# Altium PCB PCB_时钟_2022-10-18.pcbdoc
Units mil, origin at the board's own origin, x right, y up, seen from the top; angles counter-clockwise.
Board outline 4947 x 4947 mil, 2 copper layers (Top Layer, Bottom Layer); 34 components, 141 nets, 355 pads, 47 vias.
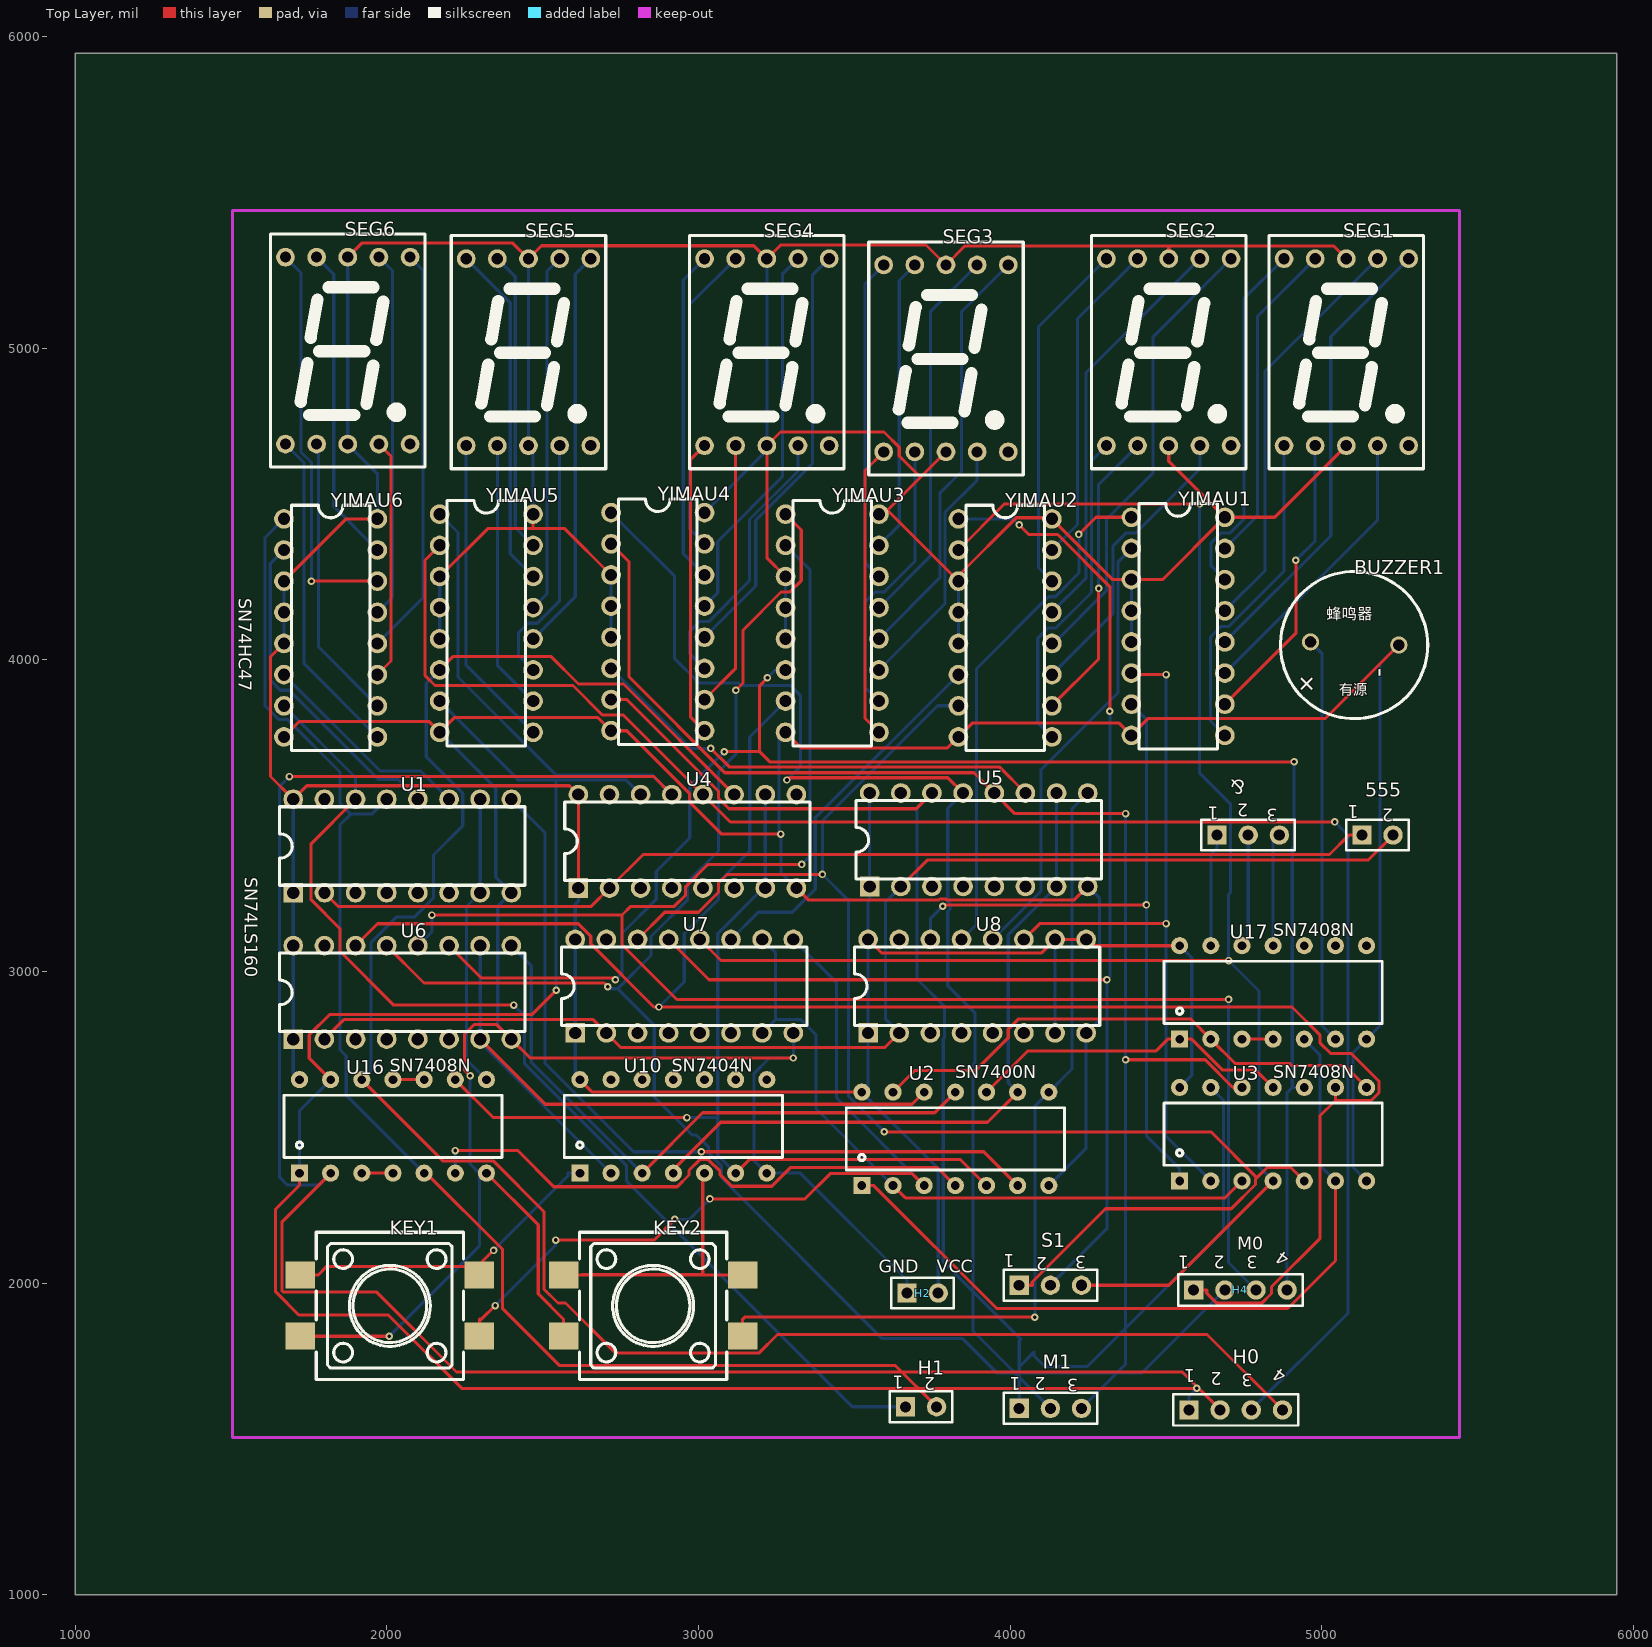
[diagram p0: Top Layer view]
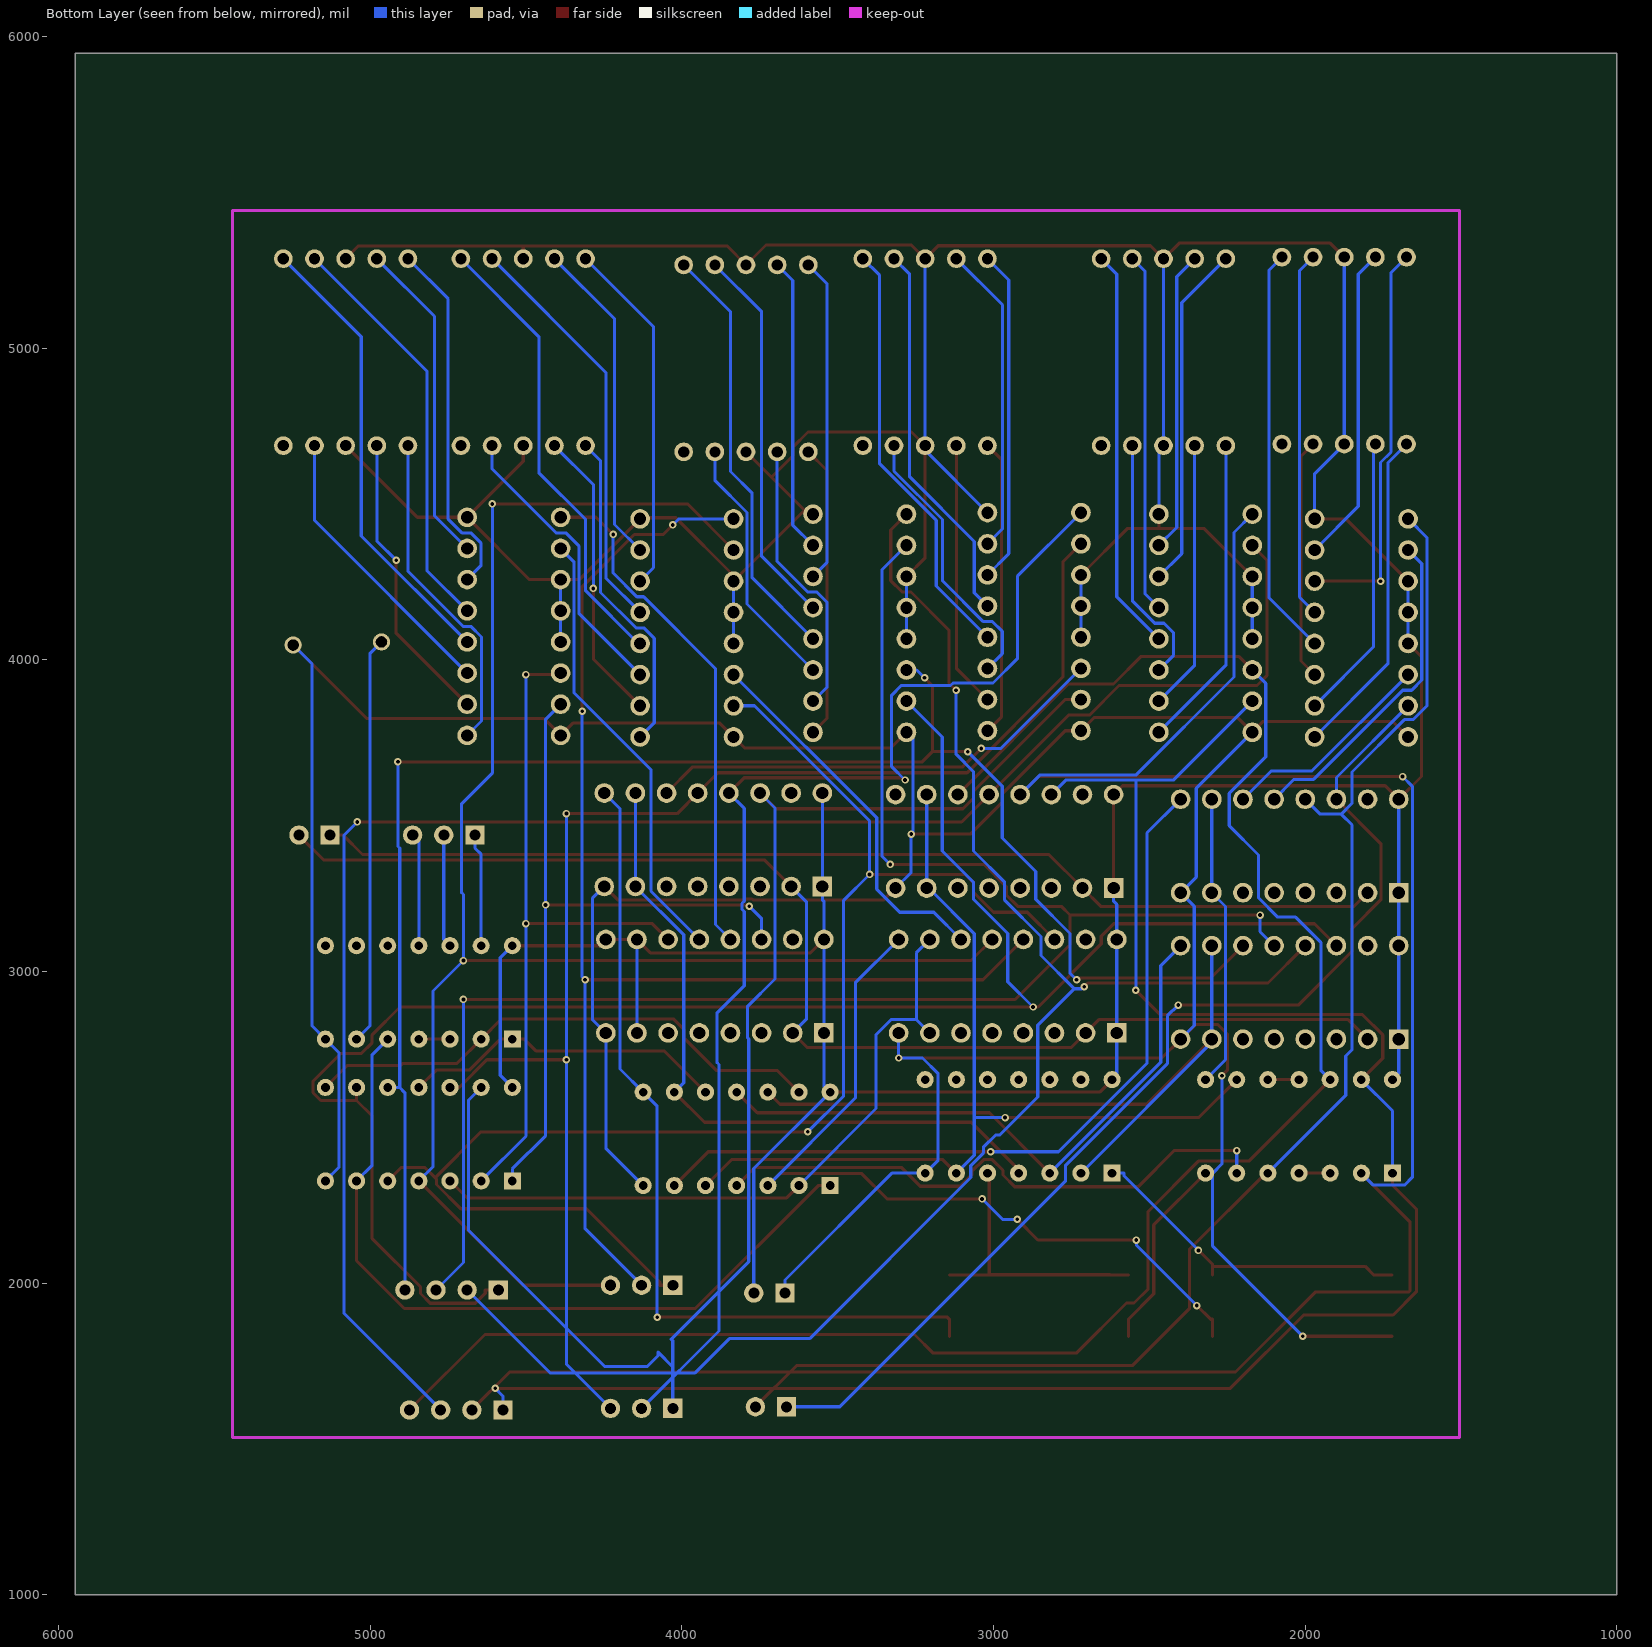
[diagram p1: Bottom Layer view, seen from below]

## Layer stack, top to bottom
Top Layer: signal copper (thickness not stored)
Dielectric: dielectric 12.6, FR-4, Dk 4.8
Bottom Layer: signal copper (thickness not stored)

## Board outline
5947,1000 1000,1000 1000,5947 5947,5947

## Components (designator, comment, footprint, x,y, rotation, side; value= is the part's Value field where it differs from the comment)
555 "HDR-F-2.54_1x2" HDR-F-2.54_1X2 5179.41,3437.91 r0 top
& "HDR-F-2.54_1x3" HDR-F-2.54_1X3 4764.41,3437.91 r0 top
BUZZER1 "有源蜂鸣器3v" 有源蜂鸣器3V 5104.41,4047.91 r0 top
H0 "HDR-F-2.54_1x4" HDR-F-2.54_1X4 4724.41,1592.91 r0 top
H1 "HDR-F-2.54_1x2" HDR-F-2.54_1X2 3714.41,1602.91 r0 top
H2 "HDR-F-2.54_1x2" HDR-F-2.54_1X2 3719.41,1967.91 r0 top
H4 "HDR-F-2.54_1x4" HDR-F-2.54_1X4 4739.41,1977.91 r0 top
KEY1 "K4-12×12_SMD" KEY-SMD_4P-L12.0-W12.0-P5.00-LS15.2 2009.41,1927.91 r0 top
KEY2 "K4-12×12_SMD" KEY-SMD_4P-L12.0-W12.0-P5.00-LS15.2 2854.41,1927.91 r0 top
M1 "HDR-F-2.54_1x3" HDR-F-2.54_1X3 4129.41,1597.91 r0 top
S1 "HDR-F-2.54_1x3" HDR-F-2.54_1X3 4129.41,1992.91 r0 top
SEG1 "SEG-TH_0.56×1_Anode" LED-SEG-TH_10P-L12.6-W19.0-P2.54-S15.24-BL 5079.41,4987.91 r0 top
SEG2 "SEG-TH_0.56×1_Anode" LED-SEG-TH_10P-L12.6-W19.0-P2.54-S15.24-BL 4509.41,4987.91 r0 top
SEG3 "SEG-TH_0.56×1_Anode" LED-SEG-TH_10P-L12.6-W19.0-P2.54-S15.24-BL 3794.41,4967.91 r0 top
SEG4 "SEG-TH_0.56×1_Anode" LED-SEG-TH_10P-L12.6-W19.0-P2.54-S15.24-BL 3219.41,4987.91 r0 top
SEG5 "SEG-TH_0.56×1_Anode" LED-SEG-TH_10P-L12.6-W19.0-P2.54-S15.24-BL 2454.41,4987.91 r0 top
SEG6 "SEG-TH_0.56×1_Anode" LED-SEG-TH_10P-L12.6-W19.0-P2.54-S15.24-BL 1874.41,4992.91 r0 top
U1 "SN74LS160N" DIP-16#1 2049.41,3402.91 r0 top
U2 "与非门SN7400N" DIP14#1 3824.41,2462.91 r0 top
U3 "与门SN7408N" DIP14#1 4844.41,2477.91 r0 top
U4 "SN74LS160N" DIP-16#1 2964.41,3417.91 r0 top
U5 "SN74LS160N" DIP-16#1 3899.41,3422.91 r0 top
U6 "SN74LS160N" DIP-16#1 2049.41,2932.91 r0 top
U7 "SN74LS160N" DIP-16#1 2954.41,2952.91 r0 top
U8 "SN74LS160N" DIP-16#1 3894.41,2952.91 r0 top
U10 "非门SN7404N" DIP14#2 2619.41,2352.91 r0 top
U16 "与门SN7408N" DIP14#1 2019.41,2502.91 r0 top
U17 "与门SN7408N" DIP14#1 4844.41,2932.91 r0 top
YIMAU1 "SN74LS47N" DIP-16#2 4539.41,4107.91 r0 top
YIMAU2 "SN74LS47N" DIP-16#2 3984.41,4102.91 r0 top
YIMAU3 "SN74LS47N" DIP-16#2 3429.41,4117.91 r0 top
YIMAU4 "SN74LS47N" DIP-16#2 2869.41,4122.91 r0 top
YIMAU5 "SN74LS47N" DIP-16#2 2319.41,4117.91 r0 top
YIMAU6 "SN74LS47N" DIP-16#2 1819.41,4102.91 r0 top

## Footprints (in the part's own frame and the unit in brackets; to place one, negate y for a bottom-side part, rotate by r counter-clockwise, add the part's x,y. Pads: shape width x height; smd on the part's side, far side on the other; paste and mask are expansions set on the pad)
DIP14#1 [mil]
  rect 55x55 hole 28: 1(-300,-150)
  round 55 hole 28: 2(-200,-150) 3(-100,-150) 4(0,-150) 5(100,-150) 6(200,-150) 7(300,-150) 8(300,150) 9(200,150) 10(100,150) 11(0,150) 12(-100,150) 13(-200,150) 14(-300,150)
  silkscreen extent -350,-100 350,100
DIP14#2 [mil]
  rect 55x55 hole 28: 1(0,0)
  round 55 hole 28: 2(100,0) 3(200,0) 4(300,0) 5(400,0) 6(500,0) 7(600,0) 8(600,300) 9(500,300) 10(400,300) 11(300,300) 12(200,300) 13(100,300) 14(0,300)
  silkscreen extent -50,50 650,250
DIP-16#1 [mm]
  rect 1.6x1.6 hole 1: 1(-8.89,-3.81)
  round 1.6 hole 1: 2(-6.35,-3.81) 3(-3.81,-3.81) 4(-1.27,-3.81) 5(1.27,-3.81) 6(3.81,-3.81) 7(6.35,-3.81) 8(8.89,-3.81) 9(8.89,3.81) 10(6.35,3.81) 11(3.81,3.81) 12(1.27,3.81) 13(-1.27,3.81) 14(-3.81,3.81) 15(-6.35,3.81) 16(-8.89,3.81)
  silkscreen extent -10,-3.2 10,3.2
DIP-16#2 [mm]
  round 1.6 hole 1: 1(-3.81,8.89) 2(-3.81,6.35) 3(-3.81,3.81) 4(-3.81,1.27) 5(-3.81,-1.27) 6(-3.81,-3.81) 7(-3.81,-6.35) 8(-3.81,-8.89) 9(3.81,-8.89) 10(3.81,-6.35) 11(3.81,-3.81) 12(3.81,-1.27) 13(3.81,1.27) 14(3.81,3.81) 15(3.81,6.35) 16(3.81,8.89)
  silkscreen extent -3.2,-10 3.2,10
HDR-F-2.54_1X2 [mil]
  rect 62x62 hole 35: 1(-50,0)
  round 62 hole 35: 2(50,0)
  silkscreen extent -100,-49 100,50
HDR-F-2.54_1X3 [mil]
  rect 62x62 hole 35: 1(-100,0)
  round 62 hole 35: 2(0,0)
  round 62 hole 36: 3(100,0)
  silkscreen extent -150,-49 150,50
HDR-F-2.54_1X4 [mil]
  rect 62x62 hole 35: 1(-150,0)
  round 62 hole 35: 2(-50,0) 3(50,0) 4(150,0)
  silkscreen extent -200,-50 200,50
KEY-SMD_4P-L12.0-W12.0-P5.00-LS15.2 [mm]
  rect 2.4x2.2 smd: 1(-7.3,2.5) 2(7.3,2.5) 3(-7.3,-2.5) 4(7.3,-2.5)
  silkscreen extent -6,-6.02 6,5.98
LED-SEG-TH_10P-L12.6-W19.0-P2.54-S15.24-BL [mil]
  round 60 hole 36: 1(-200,-300) 2(-100,-300) 3(0,-300) 4(100,-300) 5(200,-300) 6(200,300) 7(100,300) 8(0,300) 9(-100,300) 10(-200,300)
  silkscreen extent -248,-374 248,374
有源蜂鸣器3V [mm]
  round 1.4 hole 0.9 slot 0.905 at 0 deg: +(-3.556,0.254) -(3.644,0)
  silkscreen extent -6,-6 6,6

## Via types
v1: diameter 24, hole 12, Top Layer to Bottom Layer, tented both sides, 47 vias

## Nets (pads, with @x,y where several pads share a name; then routed paths per layer and width w, separated by ;. In a path a pad name is that pad's centre, name@x,y a point inside that pad or via, vN(x,y) a via of type N, cw(c..) or ccw(c..) an arc to the next point about the centre after c; other vN are vias at no path point)
BUZZER1_+: BUZZER1.+ U17.6 | length 1308.1
  Bottom Layer w10: BUZZER1.+ 5000.68,4021.64 5000.68,2826.64 U17.6
GND: BUZZER1.- H2.1 KEY1.3 KEY2.3 U1.8 U2.7 U3.7 U4.8 U5.8 U6.8 U7.8 U8.8 U10.7 U16.7 U17.7 YIMAU1.8 YIMAU2.8 YIMAU3.8 YIMAU4.8 YIMAU5.8 YIMAU6.8 | length 13794.7
  Top Layer w10: YIMAU6.8 1719.41,3802.91 2134.41,3802.91 YIMAU5.8 2216.35,3814.85 2677.47,3814.85 YIMAU4.8 2769.69,3772.91 2970.87,3571.73 2970.87,3544.53 3074.36,3441.04 v1(3264.41,3441.04) ; KEY1.3 v1(2007.47,1829.49) ; v1(2266.82,2665.22) 2249.41,2682.63 2249.41,2799.3 2279.52,2829.41 2352.91,2829.41 U6.8 2459.89,2722.43 v1(3304.41,2722.43) ; U16.7 2485.57,2186.75 2485.57,1965.25 2567.01,1883.81 KEY2.3 ; YIMAU3.8 3329.79,3717.53 3799.03,3717.53 YIMAU2.8 3878.79,3797.29 4350.03,3797.29 YIMAU1.8 4443.87,3812.37 5012.33,3812.37 BUZZER1.- ; U4.8 3352.46,3229.86 3772.15,3229.86 3774.66,3232.37 3793.77,3232.37 3796.28,3229.86 4206.36,3229.86 U5.8
  Bottom Layer w10: v1(2007.47,1829.49) 2296.69,2118.71 U16.7@2296.69,2352.91 ; YIMAU5.8 2349.41,3587.91 2349.41,3302.91 U1.8 2355.66,3209.16 2355.66,2826.66 U6.8 ; v1(2266.82,2665.22) 2266.82,2382.78 U16.7@2296.69,2352.91 ; U16.7 U16.7@2296.69,2352.91 ; YIMAU3.8 3258.48,3746.98 3258.48,3446.97 v1(3264.41,3441.04) 3264.41,3317.91 U4.8 ; U7.8 v1(3304.41,2722.43) 3227.78,2722.43 3177.67,2672.32 3177.67,2394.65 U10.7 3326.42,2352.91 3669.41,2009.92 H2.1 ; U2.7 4244.41,2432.91 U8.8 4287.62,2846.12 4287.62,3234.7 U5.8 ; U3.7 5100.67,2371.65 5100.67,2739.17 U17.7 5187.34,2825.84 5187.34,3987.38 BUZZER1.-
KEY1_1: KEY1.1 KEY1.2 U10.1 | length 1068.8
  Top Layer w10: KEY1.1 1780.26,2026.34 1807.42,2053.5 KEY1.2@2296.81,2053.5 ; KEY1.2 KEY1.2@2296.81,2053.5 ; v1(2342.24,2104.85) 2296.81,2059.42 KEY1.2@2296.81,2053.5
  Bottom Layer w10: v1(2342.24,2104.85) 2580.9,2343.51 2580.9,2352.91 U10.1
KEY1_4: KEY1.4 U2.3 U7.9 | length 2665
  Top Layer w10: KEY1.4 2296.81,1883.81 2303.22,1883.81 v1(2347.33,1927.92) ; v1@2541.52,2138.15 2857.61,2138.15 v1(2924.05,2204.59) ; v1(3036.62,2269.94) 3341.6,2269.94 3423.13,2351.47 3685.85,2351.47 U2.3
  Bottom Layer w10: v1(2347.33,1927.92) 2541.52,2122.11 v1@2541.52,2138.15 ; v1(2924.05,2204.59) 2971.27,2204.59 v1(3036.62,2269.94) ; U7.9 3443.48,2963.84 3443.48,2593.84 U2.3
  other v1: 2541.52,2138.15
KEY2_1: KEY2.1 KEY2.2 U10.5 | length 903.7
  Top Layer w10: KEY2.1 2625.26,2026.34 2625.8,2026.88 3013.57,2026.88 ; U10.5 3013.57,2347.07 3013.57,2026.88 ; KEY2.2 3014.11,2026.34 3013.57,2026.88
KEY2_4: KEY2.4 U2.8 U5.9 | length 2747.5
  Top Layer w10: KEY2.4 3141.81,1883.81 3148.59,1890.59 v1(4079.51,1890.59)
  Bottom Layer w10: v1(4079.51,1890.59) 4079.51,2568.01 U2.8 4198.85,2687.35 4198.85,3522.35 U5.9
S$54: 
S$56: 
S$59: 
SEG1_5: SEG1.5
SEG2_5: SEG2.5
SEG3_5: SEG3.5
SEG4_5: SEG4.5
SEG5_5: SEG5.5
SEG6_5: SEG6.5
U1_3: U1.3
U1_4: U1.4
U1_5: U1.5
U1_6: U1.6
U1_15: U1.15
U2_1: U2.1 U3.6 U17.5 | length 2499.2
  Top Layer w10: U2.1 3562.92,2312.91 3957.26,1918.57 4891.02,1918.57 5044.41,2071.96 U3.6
  Bottom Layer w10: U17.5 4994.41,2732.91 4994.41,2377.91 U3.6
U2_2: U2.2 U3.3 U7.7 U7.10 | length 2231
  Top Layer w10: U2.2 3663.92,2273.4 4689.9,2273.4 U3.3
  Bottom Layer w10: U7.7 3247.49,2845.99 ; U7.10 3247.49,3059.83 3247.49,2845.99 ; U2.2 3377.08,2560.24 3377.08,2796.99 3328.08,2845.99 3247.49,2845.99
U2_6: U1.9 U2.6 | length 2571.8
  Top Layer w10: v1(3009.36,2421.47) 3915.85,2421.47 U2.6
  Bottom Layer w10: U1.9 2507.29,3445.03 2507.29,2705.54 2791.36,2421.47 v1(3009.36,2421.47)
U2_10: U2.10 U3.11 U17.1 | length 1054.6
  Top Layer w10: U2.10 4055.9,2744.4 4467.39,2744.4 4505.9,2782.91 U17.1 4563.67,2782.91 4582.92,2782.91 4682.24,2683.59 4788.73,2683.59 U3.11
U2_13: U2.13 U3.8 U17.2 | length 1724.7
  Top Layer w10: U2.13 3693.35,2681.85 3888.71,2681.85 3994.41,2787.55 3994.41,2814.77 4027.84,2848.2 4579.12,2848.2 U17.2 4721.91,2705.41 4896.43,2705.41 4902.89,2698.95 5073.37,2698.95 U3.8
U3_1: U3.1 U8.14 YIMAU1.7 | length 2372.4
  Top Layer w10: v1(3784.21,3209.32) 3788.69,3213.8 v1(4437.67,3213.8)
  Bottom Layer w10: U8.14 3744.41,3169.52 v1(3784.21,3209.32) ; YIMAU1.7 4437.67,3809.65 v1(4437.67,3213.8) 4437.67,2473.16 4544.41,2366.42 U3.1
U3_2: U3.2 U8.11 YIMAU1.6 | length 2275.3
  Top Layer w10: U8.11 4095.26,3153.76 v1(4500.62,3153.76) ; YIMAU1.6 4394.16,3953.16 v1(4500.62,3953.16)
  Bottom Layer w10: v1(4500.62,3953.16) v1(4500.62,3153.76) 4500.62,2471.7 U3.2
U3_4: S1.3 U3.4 U7.12 YIMAU2.2 | length 5590.4
  Top Layer w10: U7.12 3072.14,3035.18 v1(4701.25,3035.18) ; YIMAU2.2 3982.38,4500.88 v1(4608.53,4500.88) ; S1.3 4509.41,1992.91 U3.4
  Bottom Layer w10: v1(4608.53,4500.88) 4608.53,3636.76 4708.09,3537.2 4708.09,3253.89 4701.25,3247.05 v1(4701.25,3035.18) 4799.12,2937.31 4799.12,2373.2 U3.4
U3_5: S1.1 U3.5 U7.14 YIMAU2.7 | length 4729.7
  Top Layer w10: U7.14 2891.91,3190.41 2999.88,3190.41 3064.41,3254.94 3064.41,3284.53 3091.45,3311.57 v1(3397.99,3311.57) ; v1(3596.21,2485.53) 4644.83,2485.53 4792.2,2338.17 ; S1.1 4071.42,1992.91 4071.42,2003.41 4306.53,2238.52 4709.56,2238.52 4787.61,2316.57 4787.61,2333.58 4792.2,2338.17 ; U3.5 4901.14,2371.18 4825.21,2371.18 4792.2,2338.17
  Bottom Layer w10: v1(3596.21,2485.53) 3481.02,2600.72 3481.02,3228.54 v1(3397.99,3311.57) 3397.99,3483.63 3767.27,3852.91 YIMAU2.7
U3_9: H4.1 U3.9 U6.14 YIMAU3.7 | length 5922
  Top Layer w10: U6.14 1969.71,3153.21 2614.59,3153.21 2654.42,3113.38 2654.42,3088.65 2856.95,2886.12 v1(2873.2,2886.12) 4904.94,2886.12 4994.42,2796.64 4994.42,2771.82 5029.2,2737.04 5095.08,2737.04 5184.15,2647.97 5184.15,2611.32 5159.09,2586.26 5044.41,2586.26 ; H4.1 4631.42,1977.91 4631.42,1967.41 4663.52,1935.31 4808.27,1935.31 4839.41,1966.45 4839.41,1987.73 4994.41,2142.73 4994.41,2536.26 5044.41,2586.26 ; U3.9 5044.41,2586.26
  Bottom Layer w10: v1(2873.2,2886.12) 2954.41,2967.33 2954.41,3121.99 3064.41,3231.99 3064.41,3286.99 3164.41,3386.99 3164.41,3752.91 YIMAU3.7
U3_10: H4.4 U3.10 U6.11 YIMAU3.6 | length 5357.6
  Top Layer w10: U6.11 2303.21,2979.11 2727.61,2979.11 v1(2733.45,2973.27) ; v1(3082.58,3705.74) 3196.15,3705.74 ; v1(3221.48,3942.58) 3196.15,3917.25 3196.15,3705.74 ; v1(4911.51,3673.1) 3228.79,3673.1 3196.15,3705.74
  Bottom Layer w10: v1(2733.45,2973.27) 2754.41,2994.23 2754.41,3121.99 2864.41,3231.99 2864.41,3320.92 2971.85,3428.36 2971.85,3595.01 v1(3082.58,3705.74) ; v1(3221.48,3942.58) 3246.81,3967.91 YIMAU3.6 ; H4.4 4889.41,2611.47 4905.85,2627.91 ; v1(4911.51,3673.1) 4911.51,3401.51 4905.85,3395.85 4905.85,2627.91 ; U3.10 4905.85,2627.91
U3_12: M1.3 U3.12 U5.12 YIMAU4.2 | length 4604.4
  Top Layer w10: YIMAU4.2 2776.83,4315.49 2776.83,3946.01 3084.84,3638 3884.32,3638 U5.12 4015.45,3506.87 v1(4370.66,3506.87) ; v1@4370.66,2716.75 4626.37,2716.75 4715.21,2627.91 U3.12
  Bottom Layer w10: M1.3 4370.66,1739.16 4370.66,2716.75 v1(4370.66,3506.87)
  other v1: 4370.66,2716.75
U3_13: M1.1 U3.13 U5.14 YIMAU4.7 | length 4837.8
  Top Layer w10: YIMAU4.7 2769.85,3872.91 3064.41,3578.35 3064.41,3556.05 3097.84,3522.62 3699.12,3522.62 U5.14
  Bottom Layer w10: U5.14 3701.28,3524.78 3701.28,2976.24 3790.14,2887.38 3790.14,2788.45 3785.47,2783.78 3785.47,2068.86 4034.41,1819.92 4029.41,1814.92 M1.1 4029.41,1730.9 4076.42,1777.91 4076.42,1767.41 4111.51,1732.32 4248.31,1732.32 4685.31,2169.32 4685.31,2587.01 U3.13
U4_2: 555.1 U1.2 U4.2 | length 3442.8
  Top Layer w10: U1.2 1843.12,3209.2 2655.7,3209.2 U4.2 2822.22,3375.72 5025.21,3375.72 5087.4,3437.91 555.1
U4_3: U4.3
U4_4: U4.4
U4_5: U4.5
U4_6: U4.6
U4_9: U4.9
U4_15: U4.15
U5_3: U5.3
U5_4: U5.4
U5_5: U5.5
U5_6: U5.6
U5_15: U5.15
U6_3: U6.3
U6_4: U6.4
U6_5: U6.5
U6_6: U6.6
U6_15: U6.15
U7_2: 555.2 U5.2 U6.2 U7.2 U8.2 | length 4084.3
  Top Layer w10: U6.2 1861.97,2845.47 2661.85,2845.47 U7.2 2751.56,2755.76 3597.26,2755.76 U8.2 ; U5.2 3733.86,3357.36 5148.86,3357.36 555.2
  Bottom Layer w10: U8.2 3600.66,2846.66 3600.66,3224.16 U5.2
U7_3: U7.3
U7_4: U7.4
U7_5: U7.5
U7_6: U7.6
U7_11: U7.11 YIMAU2.6 | length 1216.2
  Bottom Layer w10: U7.11 3191.91,3190.41 3300.94,3190.41 3374.94,3264.41 3374.94,3493.44 YIMAU2.6
U7_13: S1.2 U7.13 YIMAU2.1 | length 4357.6
  Top Layer w10: U7.13 3033.64,2973.68 v1(4310.94,2973.68) ; v1(4029.18,4433.3) 4059.57,4402.91 4152.69,4402.91 4320.37,4235.23 v1(4320.37,3835.34)
  Bottom Layer w10: YIMAU2.1 4009.57,4452.91 v1(4029.18,4433.3) ; S1.2 4310.94,2174.44 v1(4310.94,2973.68) 4320.37,2983.11 v1(4320.37,3835.34)
U7_15: U7.15
U8_3: U8.3
U8_4: U8.4
U8_5: U8.5
U8_6: U8.6
U8_12: U8.12 YIMAU1.2 | length 1439.3
  Bottom Layer w10: U8.12 4099.41,3257.91 4099.41,3647.97 4346.85,3895.41 4346.85,4315.35 YIMAU1.2
U8_13: U8.13 YIMAU1.1 | length 1660.1
  Top Layer w10: v1(4220.78,4402.89) 4275.8,4457.91 YIMAU1.1
  Bottom Layer w10: U8.13 3892.21,3150.71 3892.21,3972.28 4122.84,4202.91 4144.61,4202.91 4220.78,4279.08 v1(4220.78,4402.89)
U8_15: U8.15
U10_2: U2.12 U6.7 U6.10 U10.2 | length 2431.7
  Top Layer w10: U6.7 2508.38,2573.94 3685.44,2573.94 U2.12
  Bottom Layer w10: U6.10 U6.7 2299.41,2772.91 U10.2
U10_3: U2.11 U6.9 U10.3 | length 2016.7
  Top Layer w10: U10.3 3013.15,2546.65 3758.15,2546.65 U2.11
  Bottom Layer w10: U6.9 2463.4,3018.92 2463.4,2708.92 U10.3
U10_4: U2.9 U5.7 U5.10 U10.4 | length 2255.9
  Top Layer w10: U10.4 2919.41,2364.12 3071.49,2516.2 3927.7,2516.2 U2.9
  Bottom Layer w10: U2.9 3994.41,2642.91 3994.41,3117.91 U5.7 U5.10
U10_8: U10.8
U10_9: U10.9
U10_10: U10.10
U10_11: U10.11
U10_12: U10.12
U10_13: U10.13
U16_1: H0.1 U4.14 U16.1 U16.13 YIMAU5.7 | length 6386
  Top Layer w10: U16.1 1719.41,2314.4 1642.74,2237.73 1642.74,1972.35 1717.4,1897.69 2004.77,1897.69 2240.27,1662.19 v1(4599.41,1662.19) ; U16.13 1750.85,2721.47 1750.85,2796.88 1815.5,2861.53 2464.76,2861.53 v1(2543.24,2940.01)
  Bottom Layer w10: U16.1 1719.41,2552.91 U16.13 ; YIMAU5.7 2423.18,3614.14 2543.24,3614.14 ; v1(2543.24,2940.01) 2543.24,3614.14 ; U4.14 2768.18,3614.14 2543.24,3614.14 ; H0.1 4574.41,1637.19 v1(4599.41,1662.19)
U16_2: H0.2 U4.13 U16.2 YIMAU5.1 | length 7741.4
  Top Layer w10: v1(1687.16,3625.72) 2856.6,3625.72 U4.13 ; U16.2 1663.7,2197.2 1663.7,1974.88 1666.61,1971.97 1965.63,1971.97 2223.13,1714.47 4552.85,1714.47 H0.2
  Bottom Layer w10: v1(1687.16,3625.72) 1655.83,3594.39 1655.83,2339.4 1680.88,2314.35 1780.85,2314.35 U16.2 ; YIMAU5.1 2228.03,4409.29 2228.03,3945.35 2543.18,3630.2 2852.12,3630.2 U4.13
U16_3: U16.3 U16.4 | length 100
  Top Layer w10: U16.3 U16.4
U16_5: H1.2 U1.13 U16.5 YIMAU6.1 | length 4584.2
  Top Layer w10: U16.5 2126.79,2352.91 2370.38,2109.32 2370.38,1919.29 2554.77,1734.9 3632.42,1734.9 H1.2
  Bottom Layer w10: YIMAU6.1 1608.11,4391.61 1608.11,3854.04 1653.56,3808.59 1681.26,3808.59 1849.41,3640.44 1849.41,3539.73 1883.88,3505.26 ; U1.13 1951.76,3505.26 1883.88,3505.26 ; U16.5 1869.41,2602.91 1869.41,2728.91 1849.41,2748.91 1849.41,3470.79 1883.88,3505.26
U16_6: U2.4 U16.6 | length 1861.9
  Top Layer w10: v1(2219.41,2425.38) 2419.82,2425.38 2535.9,2309.3 2931.95,2309.3 2969.39,2346.74 2969.39,2361.75 3003.99,2396.35 3031.69,2396.35 3069.41,2358.63 3069.41,2347.55 3106.26,2310.7 3235.39,2310.7 3296.26,2371.57 3765.75,2371.57 U2.4
  Bottom Layer w10: U16.6 v1(2219.41,2425.38)
U16_8: U1.7 U1.10 U16.8 | length 944.8
  Bottom Layer w10: U1.10 U1.7 2255.29,3208.79 2255.29,2717.03 U16.8
U16_9: U2.5 U4.7 U4.10 U10.6 U16.9 | length 3056.2
  Top Layer w10: U16.9 2340.96,2531.36 v1(2962.86,2531.36) ; U10.6 3162.89,2396.39 3840.93,2396.39 U2.5
  Bottom Layer w10: v1(2962.86,2531.36) 3061.86,2531.36 ; U10.6 3061.86,2410.46 3061.86,2531.36 ; U4.10 U4.7 3208.02,3267.91 3061.86,3121.75 3061.86,2531.36
U16_10: U16.10 U16.11 | length 100
  Top Layer w10: U16.11 U16.10
U16_12: H0.4 U4.11 U16.12 YIMAU5.6 | length 6285.5
  Top Layer w10: U16.12 2180.85,2391.47 2342.35,2391.47 2503.84,2229.98 2503.84,1981.14 2549.03,1935.95 2573.24,1935.95 2734.06,1775.13 3193.64,1775.13 3253.48,1834.97 4632.35,1834.97 H0.4 ; YIMAU5.6 2213.16,4011.66 2526.08,4011.66 2614.83,3922.91 2759.41,3922.91 U4.11
  Bottom Layer w10: U16.12 1949.41,2682.91 1949.41,3093.54 2030.48,3174.61 2087.71,3174.61 2149.41,3236.31 2149.41,3374.19 2243.55,3468.33 2243.55,3571.88 2126.37,3689.06 2126.37,3924.87 YIMAU5.6
U17_3: U17.3 U17.4 | length 100
  Top Layer w10: U17.3 U17.4
U17_8: U17.8
U17_9: U17.9
U17_10: U17.10
U17_11: &.3 U17.11 | length 363.3
  Bottom Layer w10: U17.11 4844.41,3417.91 &.3
U17_12: &.2 U17.12 | length 363.3
  Bottom Layer w10: U17.12 4764.41,3102.91 &.2
U17_13: &.1 U17.13 | length 363.3
  Bottom Layer w10: U17.13 4644.41,3375.9 4664.41,3395.9 &.1
VCC: H2.2 SEG1.3 SEG1.8 SEG2.3 SEG2.8 SEG3.3 SEG3.8 SEG4.3 SEG4.8 SEG5.3 SEG5.8 SEG6.3 SEG6.8 U1.1 U1.16 U2.14 U3.14 U4.1 U4.16 U5.1 U5.16 U6.1 U6.16 U7.1 U7.16 U8.1 U8.7 U8.9 U8.10 U8.16 U10.14 U16.14 U17.14 YIMAU1.3 YIMAU1.4 YIMAU1.5 YIMAU1.16 YIMAU2.3 YIMAU2.4 YIMAU2.5 YIMAU2.16 YIMAU3.3 YIMAU3.4 YIMAU3.5 YIMAU3.16 YIMAU4.3 YIMAU4.4 YIMAU4.5 YIMAU4.16 YIMAU5.3 YIMAU5.4 YIMAU5.5 YIMAU5.16 YIMAU6.3 YIMAU6.4 YIMAU6.5 YIMAU6.16 | length 19668.3
  Top Layer w10: YIMAU6.5 1626.33,4009.83 1626.33,3625.99 U1.16 1742.91,3596.41 2585.91,3596.41 U4.16 2614.41,3310.42 U4.1 ; YIMAU6.3 1869.41,4452.91 YIMAU6.16 ; SEG6.8 1919.54,5338.04 2404.28,5338.04 SEG5.8 2496,5329.5 3177.82,5329.5 SEG4.8 3263.58,5332.08 3730.24,5332.08 SEG3.8 3855.47,5328.97 4509.41,5328.97 ; YIMAU5.3 2323.13,4421.63 2469.41,4421.63 ; YIMAU5.16 2469.41,4421.63 ; U10.14 2659.41,2612.91 U2.14 ; YIMAU4.3 2570.69,4421.63 2469.41,4421.63 ; YIMAU3.3 3219.41,4327.91 SEG4.3 3263.1,4731.6 3595.35,4731.6 3644.41,4682.54 3644.41,4654.71 3712.81,4586.31 ; U8.16 3587.49,3059.83 4101.33,3059.83 U8.10 U8.9 4264.41,3082.91 U17.14 ; YIMAU3.16 3594.41,4467.91 YIMAU3.16@3606.91,4480.41 ; SEG3.3 3712.81,4586.31 ; SEG2.3 4509.41,4637.91 YIMAU1.16 ; SEG2.8 4509.41,5328.97 ; SEG1.3 4849.41,4457.91 YIMAU1.16 ; SEG1.8 5038.35,5328.97 4509.41,5328.97 ; YIMAU3.16@3606.91,4480.41 3712.81,4586.31 ; YIMAU3.16@3606.91,4480.41 YIMAU2.3 3834.41,4271.13 4019.63,4456.35 4130.97,4456.35 YIMAU2.16 4329.41,4257.91 YIMAU1.3 4489.41,4257.91 YIMAU1.16
  Bottom Layer w10: YIMAU6.5 YIMAU6.4 YIMAU6.3 ; U1.16 U1.1 U6.16 U6.1 1699.41,2672.91 U16.14 ; SEG6.8 SEG6.3 1969.41,4597.91 YIMAU6.16 ; YIMAU5.5 YIMAU5.4 YIMAU5.3 ; SEG5.8 SEG5.3 2469.41,4672.91 YIMAU5.16 ; U4.1 2614.41,3225.41 2604.41,3215.41 U7.16 2604.41,2845.42 U7.1 2604.41,2667.91 U10.14 ; YIMAU4.5 YIMAU4.4 YIMAU4.3 ; YIMAU4.16 3219.41,4672.91 SEG4.3 SEG4.8 ; YIMAU3.5 YIMAU3.4 YIMAU3.3 ; U5.16 U5.1 3549.41,3251.66 3549.41,3230.41 3544.41,3225.41 U8.16 U8.1 3544.41,2632.91 U2.14 3769.41,2367.91 H2.2 ; YIMAU2.5 YIMAU2.4 YIMAU2.3 ; U8.7 U8.10 ; YIMAU1.5 YIMAU1.4 YIMAU1.3 ; U3.14 4583.2,2666.7 4583.2,3044.12 U17.14
YIMAU1_9: SEG1.1 YIMAU1.9 | length 1061.5
  Bottom Layer w10: YIMAU1.9 4643.38,3803.94 4643.38,4073.68 4677.63,4107.93 4702.75,4107.93 4879.41,4284.59 SEG1.1
YIMAU1_10: SEG1.2 YIMAU1.10 | length 950.1
  Top Layer w10: YIMAU1.10 4917.4,4085.9 v1(4917.4,4319.69)
  Bottom Layer w10: v1(4917.4,4319.69) 4979.41,4381.7 SEG1.2
YIMAU1_11: SEG1.4 YIMAU1.11 | length 933
  Bottom Layer w10: YIMAU1.11 5179.41,4447.91 SEG1.4
YIMAU1_12: SEG1.6 YIMAU1.12 | length 1474.4
  Bottom Layer w10: YIMAU1.12 5029.41,4397.91 5029.41,5037.91 SEG1.6
YIMAU1_13: SEG1.7 YIMAU1.13 | length 1333
  Bottom Layer w10: YIMAU1.13 4818.75,4287.25 4818.75,4927.25 SEG1.7
YIMAU1_14: SEG1.10 YIMAU1.14 | length 1162.2
  Bottom Layer w10: YIMAU1.14 4645.34,4301.98 4645.34,4375.71 4677.54,4407.91 4706.51,4407.91 4750.47,4451.87 4750.47,5158.97 SEG1.10
YIMAU1_15: SEG1.9 YIMAU1.15 | length 1050.1
  Bottom Layer w10: YIMAU1.15 4794.42,4462.92 4794.42,5102.92 SEG1.9
YIMAU2_9: SEG2.1 YIMAU2.9 | length 1059.7
  Bottom Layer w10: YIMAU2.9 4089.12,3798.2 4089.12,4069.42 4122.59,4102.89 4147.71,4102.89 4261.41,4216.59 4261.41,4639.91 SEG2.1
YIMAU2_10: SEG2.2 YIMAU2.10 | length 948.9
  Top Layer w10: YIMAU2.10 4284.46,4002.96 v1(4284.46,4229.5)
  Bottom Layer w10: v1(4284.46,4229.5) 4284.46,4562.96 SEG2.2
YIMAU2_11: SEG2.4 YIMAU2.11 | length 950
  Bottom Layer w10: YIMAU2.11 4329.86,4148.36 4329.86,4364.73 4373.04,4407.91 4404.22,4407.91 4609.41,4613.1 SEG2.4
YIMAU2_12: SEG2.6 YIMAU2.12 | length 1476.7
  Bottom Layer w10: YIMAU2.12 4140.48,4052.91 4309.22,4221.65 4309.22,4450.63 4459.41,4600.82 4459.41,5037.91 SEG2.6
YIMAU2_13: SEG2.7 YIMAU2.13 | length 1331.8
  Bottom Layer w10: YIMAU2.13 4243.83,4262.33 4243.83,4922.33 SEG2.7
YIMAU2_14: SEG2.10 YIMAU2.14 | length 1143.3
  Bottom Layer w10: YIMAU2.14 4091.12,4296.2 4091.12,5069.62 SEG2.10
YIMAU2_15: SEG2.9 YIMAU2.15 | length 1048.9
  Bottom Layer w10: YIMAU2.15 4216.5,4435 4216.5,5095 SEG2.9
YIMAU3_1: H4.2 U6.13 YIMAU3.1 | length 5340.8
  Top Layer w10: U6.13 2119.26,2963.06 2697.13,2963.06 v1(2709.09,2951.1) ; v1(3120.11,3903.06) 3143.08,3926.03 3143.08,4095.88 3265.11,4217.91 3293.38,4217.91 3329.96,4254.49 3329.96,4417.36 YIMAU3.1
  Bottom Layer w10: v1(2709.09,2951.1) 2715.46,2944.73 2740.88,2944.73 ; v1(3120.11,3903.06) 3120.11,3697.22 3064.41,3641.52 3064.41,3386.99 2964.41,3286.99 2964.41,3229.31 2847.7,3112.6 2847.7,3051.55 2740.88,2944.73 ; H4.2 4423.37,1711.87 3957.73,1711.87 3847.92,1821.68 3590.31,1821.68 3073.18,2338.81 3073.18,2376.43 3032.42,2417.19 3032.42,2436.1 2993,2475.52 2979.84,2475.52 2857.97,2597.39 2857.97,2827.64 2740.88,2944.73
YIMAU3_2: H4.3 U6.12 YIMAU3.2 | length 5538.2
  Top Layer w10: v1(2144.48,3181.21) 2754.42,3181.21 ; v1(3331.8,3343.65) 3029.97,3343.65 2958.74,3272.42 2958.74,3245.83 2922.09,3209.18 2782.39,3209.18 2754.42,3181.21 ; v1(4701.41,2910.33) 2930.55,2910.33 2754.42,3086.46 2754.42,3181.21
  Bottom Layer w10: U6.12 2144.48,3127.98 v1(2144.48,3181.21) ; YIMAU3.2 3357.73,4289.59 3357.73,3369.58 v1(3331.8,3343.65) ; v1(4701.41,2910.33) 4701.41,2065.91 H4.3
YIMAU3_9: SEG3.1 YIMAU3.9 | length 943.4
  Top Layer w10: YIMAU3.9 3534.51,3812.81 3534.51,4608.01 SEG3.1
YIMAU3_10: SEG3.2 YIMAU3.10 | length 902.1
  Bottom Layer w10: YIMAU3.10 3534.12,3913.2 3534.12,4184.48 3567.55,4217.91 3596.51,4217.91 3694.41,4315.81 SEG3.2
YIMAU3_11: SEG3.4 YIMAU3.11 | length 830.5
  Bottom Layer w10: YIMAU3.11 3791.01,4179.51 3791.01,4473.19 3894.41,4576.59 SEG3.4
YIMAU3_12: SEG3.6 YIMAU3.12 | length 1371.9
  Bottom Layer w10: YIMAU3.12 3774.95,4263.45 3774.95,4535.44 3844.41,4604.9 3844.41,5117.91 SEG3.6
YIMAU3_13: SEG3.7 YIMAU3.13 | length 1230.5
  Bottom Layer w10: YIMAU3.13 3744.41,4332.91 3744.41,5117.91 SEG3.7
YIMAU3_14: SEG3.10 YIMAU3.14 | length 1043.2
  Bottom Layer w10: YIMAU3.14 3534.81,4312.51 3534.81,5208.31 SEG3.10
YIMAU3_15: SEG3.9 YIMAU3.15 | length 947.6
  Bottom Layer w10: YIMAU3.15 3644.41,4432.91 3644.41,5217.91 SEG3.9
YIMAU4_1: M1.2 U5.13 YIMAU4.1 | length 4027.5
  Top Layer w10: v1@3283.93,3614.75 3291.12,3621.94 3800.38,3621.94 U5.13
  Bottom Layer w10: YIMAU4.1 2922.51,4269.81 2922.51,4005.08 3001.48,3926.11 3129.67,3926.11 3137.87,3917.91 3296.22,3917.91 3326.89,3887.24 3326.89,3657.71 v1@3283.93,3614.75 ; U5.13 3800.12,3523.62 3800.12,3226.02 3807.26,3218.88 3807.26,3199.76 3800.12,3192.62 3800.12,2954.07 3887.99,2866.2 3887.99,2708.35 3881.2,2701.56 3881.2,1846.12 M1.2
  other v1: 3283.93,3614.75
YIMAU4_6: U5.11 YIMAU4.6 | length 1495.7
  Top Layer w10: v1(3039.48,3715.96) 3098.4,3657.04 3965.28,3657.04 U5.11
  Bottom Layer w10: YIMAU4.6 2976.36,3715.96 v1(3039.48,3715.96)
YIMAU4_9: SEG4.1 YIMAU4.9 | length 952.6
  Top Layer w10: YIMAU4.9 2974.08,3818.24 2974.08,4642.58 SEG4.1
YIMAU4_10: SEG4.2 YIMAU4.10 | length 856.4
  Top Layer w10: YIMAU4.10 3119.41,3972.91 SEG4.2
YIMAU4_11: SEG4.4 YIMAU4.11 | length 896.1
  Bottom Layer w10: YIMAU4.11 2971.87,4020.45 2971.87,4091.73 3003.05,4122.91 3032.79,4122.91 3164,4254.12 3164,4450.64 3319.41,4606.05 SEG4.4
YIMAU4_12: SEG4.6 YIMAU4.12 | length 1380.7
  Bottom Layer w10: YIMAU4.12 3183.95,4237.45 3183.95,4447.88 3365.73,4629.66 3365.73,5234.23 SEG4.6
YIMAU4_13: SEG4.7 YIMAU4.13 | length 1239.3
  Bottom Layer w10: YIMAU4.13 3061.97,4215.47 3061.97,4380.16 3269.41,4587.6 3269.41,5237.91 SEG4.7
YIMAU4_14: SEG4.10 YIMAU4.14 | length 1071.5
  Bottom Layer w10: YIMAU4.14 2951.17,4341.15 2951.17,5219.67 SEG4.10
YIMAU4_15: SEG4.9 YIMAU4.15 | length 996.3
  Bottom Layer w10: YIMAU4.15 2971.22,4421.1 2971.22,5139.72 SEG4.9
YIMAU5_2: H0.3 U4.12 YIMAU5.2 | length 5584.8
  Top Layer w10: YIMAU5.2 2122.55,4321.05 2122.55,3949.65 2154.29,3917.91 2597.14,3917.91 2692.16,3822.89 2759.43,3822.89 U4.12 3102.34,3479.98 v1(5041.84,3479.98)
  Bottom Layer w10: H0.3 5084.61,1903.11 5084.61,3437.21 v1(5041.84,3479.98)
YIMAU5_9: SEG5.1 YIMAU5.9 | length 1009.1
  Bottom Layer w10: SEG5.1 2254.41,3982.91 YIMAU5.9
YIMAU5_10: SEG5.2 YIMAU5.10 | length 867.6
  Bottom Layer w10: SEG5.2 2354.41,3982.91 YIMAU5.10
YIMAU5_11: SEG5.4 YIMAU5.11 | length 812
  Bottom Layer w10: YIMAU5.11 2421.87,4015.45 2421.87,4086.73 2453.05,4117.91 2482.79,4117.91 2554.41,4189.53 SEG5.4
YIMAU5_12: SEG5.6 YIMAU5.12 | length 1296.6
  Bottom Layer w10: YIMAU5.12 2604.41,4202.91 2604.41,5237.91 SEG5.6
YIMAU5_13: SEG5.7 YIMAU5.13 | length 1155.2
  Bottom Layer w10: YIMAU5.13 2513.34,4211.84 2513.34,5246.84 SEG5.7
YIMAU5_14: SEG5.10 YIMAU5.14 | length 1109.1
  Bottom Layer w10: SEG5.10 2395.89,5146.43 2395.89,4341.43 YIMAU5.14
YIMAU5_15: SEG5.9 YIMAU5.15 | length 967.6
  Bottom Layer w10: SEG5.9 2411.95,5230.37 2411.95,4425.37 YIMAU5.15
YIMAU6_2: U1.12 YIMAU6.2 | length 1068
  Bottom Layer w10: YIMAU6.2 1625.44,4308.94 1625.44,3935.55 1658.08,3902.91 1686.64,3902.91 1972.62,3616.93 2035.39,3616.93 U1.12
YIMAU6_6: U1.11 YIMAU6.6 | length 695.7
  Bottom Layer w10: YIMAU6.6 1979.22,3643.1 2109.22,3643.1 U1.11
YIMAU6_7: H1.1 U1.14 YIMAU6.7 | length 3520.7
  Top Layer w10: U1.14 1756.77,3410.27 1756.77,3230.42 1849.41,3137.78 1849.41,3064.7 2021.91,2892.2 v1(2407.47,2892.2)
  Bottom Layer w10: YIMAU6.7 1899.41,3622.91 U1.14 ; v1(2407.47,2892.2) 2441.96,2857.71 2441.96,2704.3 2769.41,2376.85 2769.41,2326.63 3493.13,1602.91 H1.1
YIMAU6_9: SEG6.1 YIMAU6.9 | length 1062.2
  Bottom Layer w10: SEG6.1 1733.35,4633.97 1733.35,3988.97 YIMAU6.9
YIMAU6_10: SEG6.2 YIMAU6.10 | length 920.8
  Bottom Layer w10: SEG6.2 1780.81,4686.51 1780.81,4041.51 YIMAU6.10
YIMAU6_11: SEG6.4 YIMAU6.11 | length 774.1
  Top Layer w10: YIMAU6.11 2013.08,3996.58 2013.08,4654.24 SEG6.4
YIMAU6_12: SEG6.6 YIMAU6.12 | length 1317.5
  Bottom Layer w10: YIMAU6.12 2115.47,4198.97 2115.47,5251.85 SEG6.6
YIMAU6_13: SEG6.7 YIMAU6.13 | length 1178.3
  Bottom Layer w10: YIMAU6.13 2018.16,4201.66 2018.16,5249.16 SEG6.7
YIMAU6_14: SEG6.10 YIMAU6.14 | length 1286.2
  Top Layer w10: v1(1757.76,4252.91) YIMAU6.14
  Bottom Layer w10: SEG6.10 1724.41,5242.91 1724.41,4667.22 1757.76,4633.87 v1(1757.76,4252.91)
YIMAU6_15: SEG6.9 YIMAU6.15 | length 1020.8
  Bottom Layer w10: SEG6.9 1829.46,5237.86 1829.46,4492.86 YIMAU6.15

## Silkscreen, mask and mechanical layers (free items; w line width, h text height)
Top Overlay:
  text "SN74HC47" at 1524.09,4197.91 h40.63 r270
  text "2" at 4764.41,3538.22 h40.63 r180
  text "1" at 5119.41,3533.22 h40.63 r180
  text "1" at 4669.41,3528.22 h40.63 r180
  text "3" at 4859.41,3523.22 h40.63 r180
  text "2" at 5229.41,3523.22 h40.63 r180
  text "SN74LS160" at 1544.09,3302.91 h40.63 r270
  text "SN7408N" at 4844.41,3112.59 h40.63
  text "SN7408N" at 2009.41,2677.59 h40.63
  text "SN7404N" at 2914.41,2677.59 h40.63
  text "SN7400N" at 3824.41,2657.59 h40.63
  text "SN7408N" at 4844.41,2657.59 h40.63
  text "M0" at 4729.41,2107.59 h40.63
  text "1" at 4014.41,2093.22 h40.63 r180
  text "3" at 4244.41,2088.22 h40.63 r180
  text "1" at 4574.41,2088.22 h40.63 r180
  text "2" at 4689.41,2088.22 h40.63 r180
  text "3" at 4794.41,2088.22 h40.63 r180
  text "4" at 4901.35,2084.35 h40.63 r144
  text "2" at 4119.41,2083.22 h40.63 r180
  text "GND" at 3579.41,2032.6 h40.63
  text "VCC" at 3764.41,2032.6 h40.63
  text "1" at 4594.41,1723.22 h40.63 r180
  text "2" at 4679.41,1713.22 h40.63 r180
  text "3" at 4779.02,1708.62 h40.63 r180
  text "4" at 4891.35,1709.35 h40.63 r144
  text "1" at 3659.41,1703.22 h40.63 r180
  text "2" at 3759.41,1698.22 h40.63 r180
  text "1" at 4034.41,1698.22 h40.63 r180
  text "2" at 4114.41,1698.22 h40.63 r180
  text "3" at 4219.41,1693.22 h40.63 r180

## Text inside footprints (layer, text, board x,y; h text height)
BUZZER1: Top Overlay "-" at 5208.41,3943.91 h60 r90; Top Overlay "蜂鸣器" at 5014.41,4117.91 h62.99; Top Overlay "+" at 4959.2,3965.12 h60 r225; Top Overlay "有源" at 5054.41,3877.91 h59.05